# Altium PCB panelize_2025-07-22.pcbdoc
Units mm, origin at the board's own origin, x right, y up, seen from the top; angles counter-clockwise.
Board outline 175.32 x 105.77 mm, 2 copper layers (Top Layer, Bottom Layer); 56 components, 44 nets, 165 pads, 454 vias.
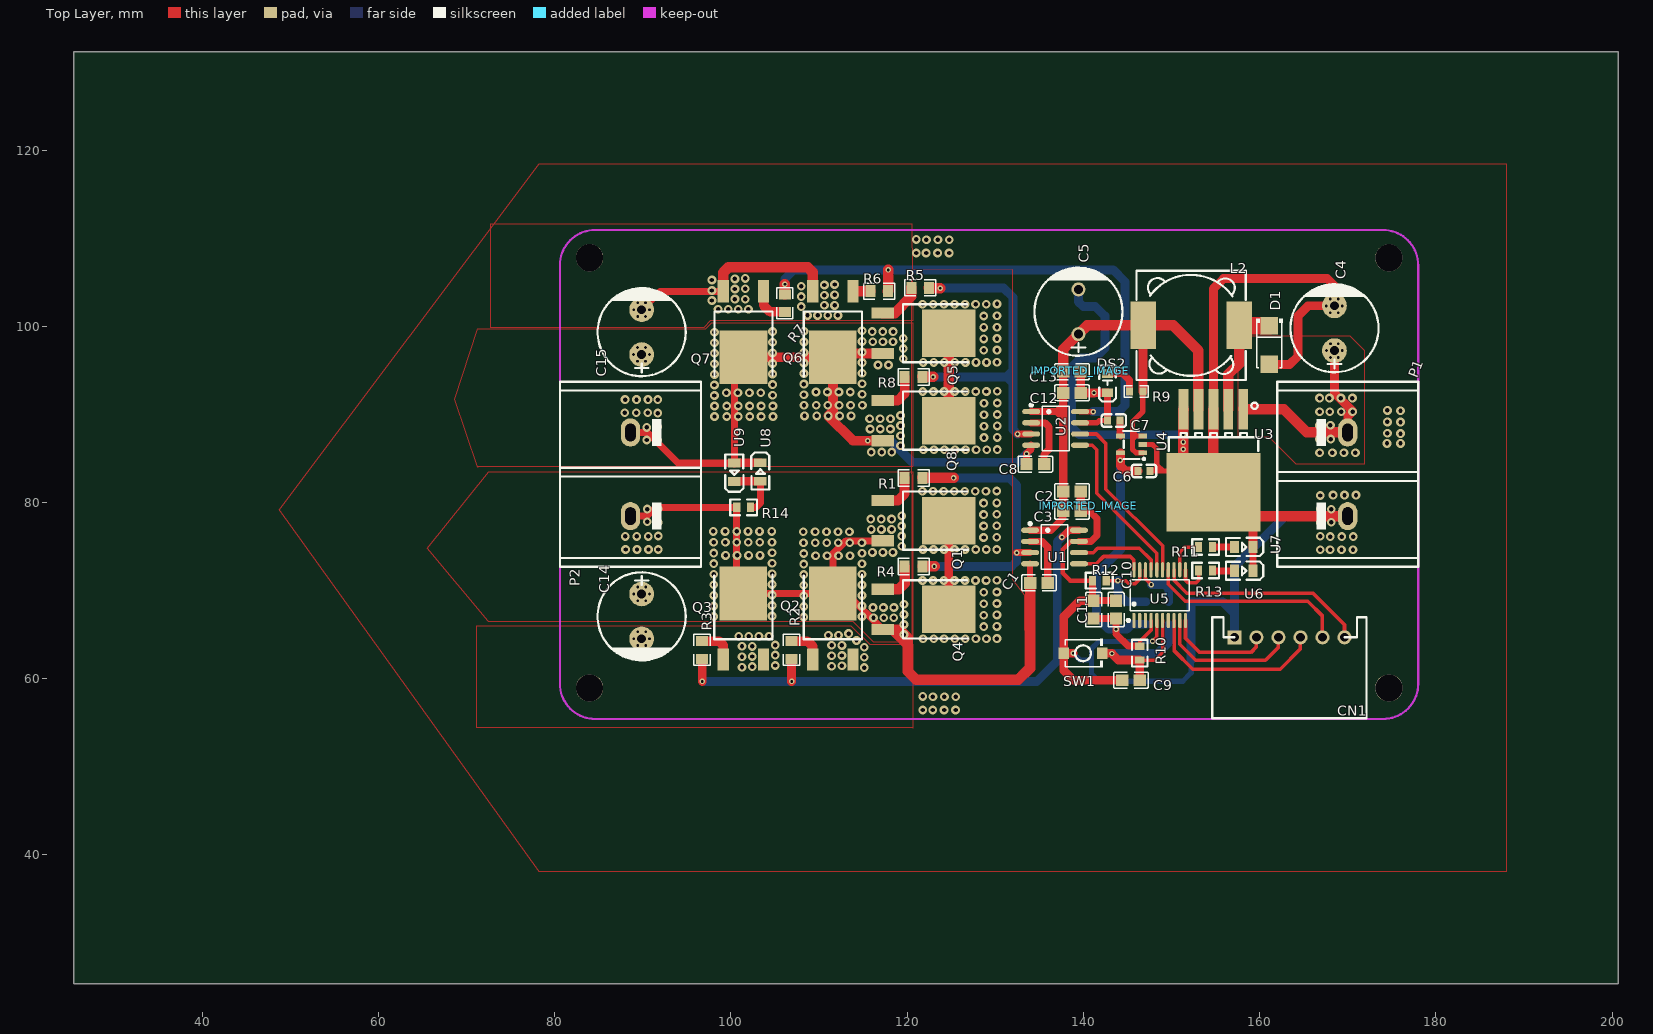
[diagram p0: Top Layer view]
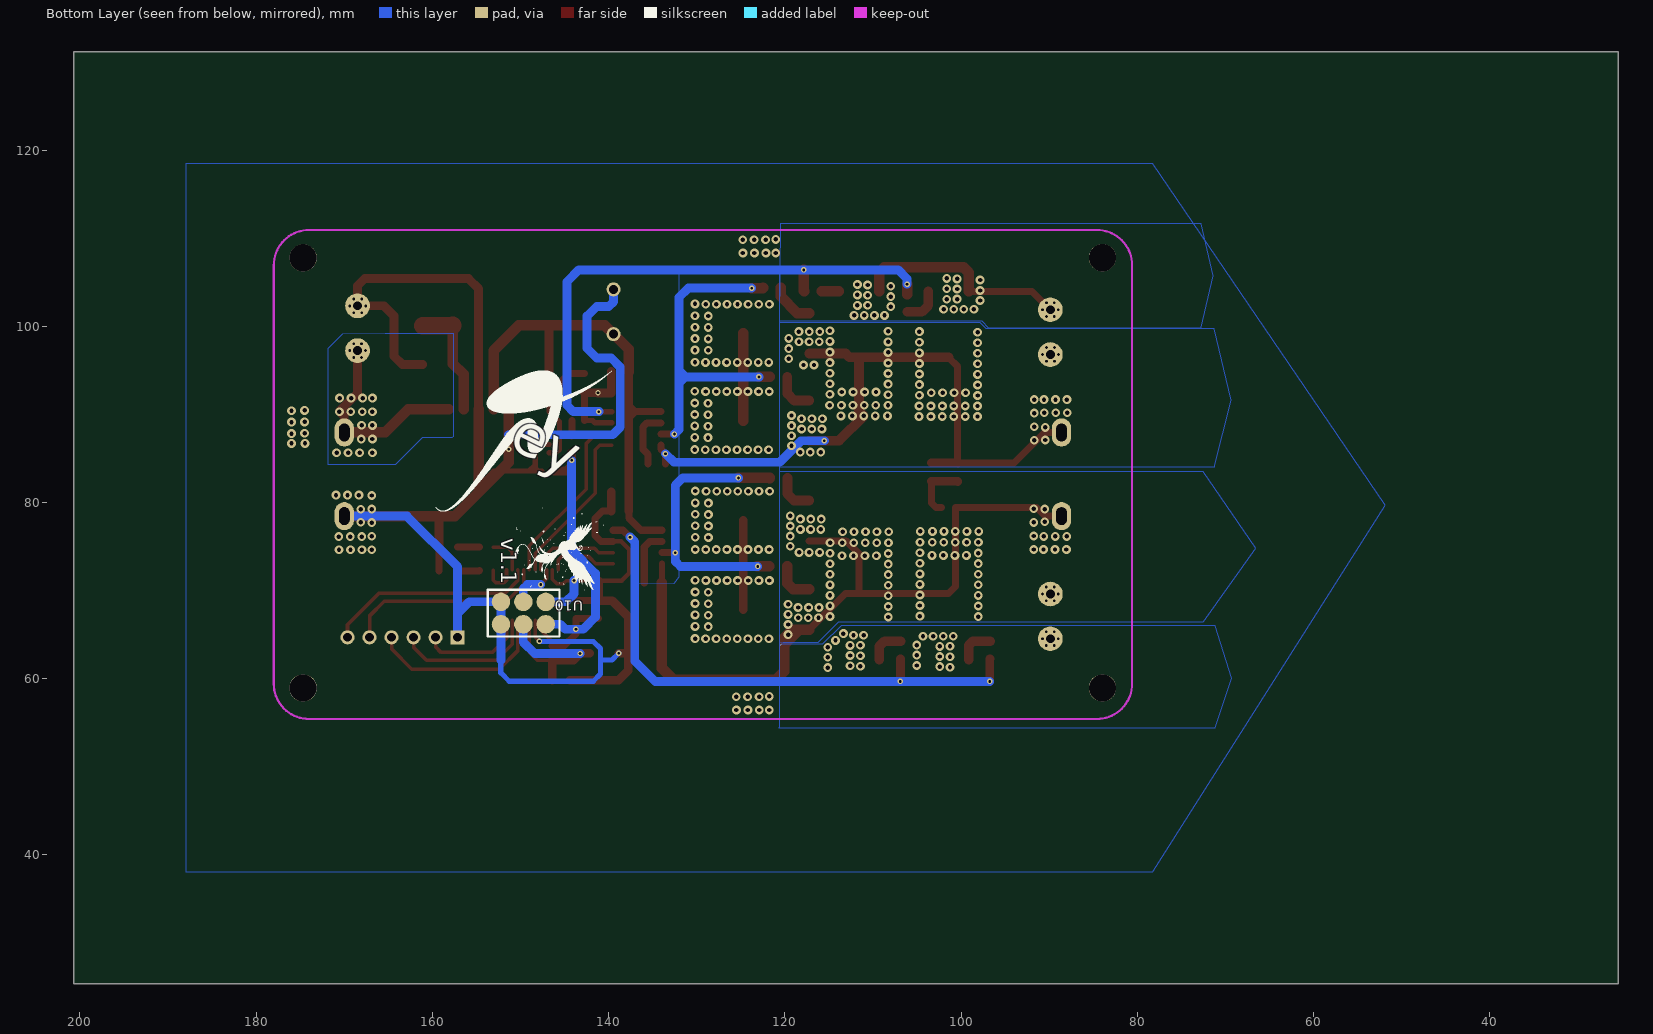
[diagram p1: Bottom Layer view, seen from below]

## Layer stack, top to bottom
Top Layer: signal copper (thickness not stored)
Dielectric: dielectric 0.32, FR-4, Dk 4.8
Bottom Layer: signal copper (thickness not stored)

## Board outline
200.72,25.4 25.4,25.4 25.4,131.17 200.72,131.17

## Components (designator, comment, footprint, x,y, rotation, side; value= is the part's Value field where it differs from the comment)
C1 "100nF" C0805 134.96,70.88 r0 top
C2 "1nf" C0805 138.71,81.23 r180 top
C3 "10uF" C0805 138.71,79.02 r180 top
C4 "470uF" CAP-TH_BD10.0-P5.00-D1.0-FD#1 168.5,99.78 r90 top
C5 "470uF" CAP-TH_BD10.0-P5.00-D1.0-FD#2 139.44,101.65 r90 top
C6 "2.2uF" C0603 146.888,83.583 r180 top
C7 "470pF" C0603 143.46,89.3 r0 top
C8 "100nF" C0805 134.55,84.35 r0 top
C9 "100nF" C0805 145.4,59.83 r0 top
C10 "10uF" C0805 143.713,67.835 r90 top
C11 "100nF" C0805 141.173,67.835 r270 top
C12 "10uF" C0805 138.71,92.437 r180 top
C13 "1nf" C0805 138.71,94.85 r180 top
C14 "470uF" CAP-TH_BD10.0-P5.00-D1.0-FD#1 89.865,67.073 r270 top
C15 "470uF" CAP-TH_BD10.0-P5.00-D1.0-FD#1 89.865,99.331 r90 top
CN1 "S6B-XH-A (LF)(SN)" CONN-TH_S6B-XH-A-LF-SN 163.39,64.7 r180 top
D1 "SS34-SMA(DO-214AC)" SMA_L4.3-W2.6-LS5.2-RD 161.11,97.88 r270 top
DS2 "LED0805-1" LED0805-RD 142.74,93.55 r90 top
IMPORTED_IMAGE "IMPORTED_IMAGE" IMPORTED_IMAGE 139.642,94.979 r0 top
IMPORTED_IMAGE "IMPORTED_IMAGE" IMPORTED_IMAGE 140.561,79.629 r0 top
L2 "33uH" IND-SMD_L12.3-W12.3 152.222,100.093 r0 top
P1 "WJ45C-B-2P" CONN-TH_2P-P9.50_WJ45C-B-2P 170.002,83.202 r270 top
P2 "WJ45C-B-2P" CONN-TH_2P-P9.50_WJ45C-B-2P 88.595,83.202 r90 top
Q1 "NCE30H12K" TO-252-3_L6.5-W5.8-P4.58-BL 120.98,77.94 r270 top
Q2 "NCE30H12K" TO-252-3_L6.5-W5.8-P4.58-BL 111.582,65.93 r0 top
Q3 "NCE30H12K" TO-252-3_L6.5-W5.8-P4.58-BL 101.422,65.93 r0 top
Q4 "NCE30H12K" TO-252-3_L6.5-W5.8-P4.58-BL 120.98,67.86 r270 top
Q5 "NCE30H12K" TO-252-3_L6.5-W5.8-P4.58-BL 120.98,99.204 r270 top
Q6 "NCE30H12K" TO-252-3_L6.5-W5.8-P4.58-BL 111.577,100.22 r180 top
Q7 "NCE30H12K" TO-252-3_L6.5-W5.8-P4.58-BL 101.422,100.22 r180 top
Q8 "NCE30H12K" TO-252-3_L6.5-W5.8-P4.58-BL 120.98,89.298 r270 top
R1 "4.7Ω" R0805 120.726,82.78 r180 top
R2 "4.7Ω" R0805 106.883,63.263 r90 top
R3 "4.7Ω" R0805 96.723,63.263 r90 top
R4 "4.7Ω" R0805 120.726,72.74 r180 top
R5 "4.7Ω" R0805 121.48,104.36 r180 top
R6 "4.7Ω" R0805 116.82,103.99 r180 top
R7 "4.7Ω" R0805 106.121,102.633 r270 top
R8 "4.7Ω" R0805 120.726,94.251 r180 top
R9 "10kΩ" R0603 145.999,92.6 r180 top
R10 "10k" 0603 146.4,62.9 r90 top
R11 "10k" 0603 153.873,74.947 r180 top
R12 "10k" 0603 141.808,71.137 r180 top
R13 "10k" 0603 153.873,72.28 r180 top
R14 "10k" 0603 101.44,79.44 r0 top
SW1 "TS-1088-AR02016" SW-SMD_L3.9-W3.0-P4.45 139.96,62.89 r0 top
U1 "UCC27282DR" SOIC-8_L4.9-W3.9-P1.27-LS6.0-BL 136.728,74.947 r270 top
U2 "UCC27282DR" SOIC-8_L4.9-W3.9-P1.27-LS6.0-BL 136.855,88.409 r270 top
U3 "LM2596HVS-12" PG-TO-263-5_L10.0-W9.0-P1.70-LS15.0-BR 154.762,85.869 r90 top
U4 "MIC5219-3.3YM5" SOT-23-5_L3.0-W1.7-P0.95-LS2.8-TL 145.47,86.59 r180 top
U5 "STM32G030F6P6TR" TSSOP-20_L6.5-W4.4-P0.65-LS6.4-BL 148.666,69.486 r0 top
U6 "YLED0805YG" LED0805-R-RD 158.191,72.25 r180 top
U7 "YLED0805YG" LED0805-R-RD 158.191,74.947 r180 top
U8 "YLED0805YG" LED0805-R-RD 103.34,83.46 r270 top
U9 "YLED0805YG" LED0805-R-RD 100.38,83.44 r90 top
U10 "POGO-6PIN" CONN-SMD_6P-POGO-6PIN 149.682,67.454 r180 bottom

## Footprints (in the part's own frame and the unit in brackets; to place one, negate y for a bottom-side part, rotate by r counter-clockwise, add the part's x,y. Pads: shape width x height; smd on the part's side, far side on the other; paste and mask are expansions set on the pad)
0603 [mil]
  rect 32x43 smd paste+0 mask+2: 1(-31,0) 2(31,0)
  silkscreen extent -60,-35 60,35
C0603 [mm]
  rect 0.8x0.9 smd paste+0 mask+0.051: 1(-0.7,0) 2(0.7,0)
  silkscreen extent -1.39,-0.71 1.39,0.71
C0805 [mm]
  rect 1.41x1.35 smd paste-100 mask+0.051: 1(-1,0) 2(1,0)
  silkscreen extent -1.96,-0.9 1.96,0.9
CAP-TH_BD10.0-P5.00-D1.0-FD#1 [mm]
  round 2.8 hole 1 paste+0 mask+0.051: 1(-2.54,0) 2(2.54,0)
  silkscreen extent -5,-5 5.08,5
CAP-TH_BD10.0-P5.00-D1.0-FD#2 [mm]
  round 1.6 hole 1 paste+0 mask+0.051: 1(-2.54,0) 2(2.54,0)
  silkscreen extent -5,-5 5.08,5
CONN-SMD_6P-POGO-6PIN [mm]
  round 2.1 smd paste+0 mask+0.05: 1(2.54,-1.27) 2(2.54,1.27) 3(0,-1.27) 4(0,1.27) 5(-2.54,-1.27) 6(-2.54,1.27)
  silkscreen extent -4.05,-2.65 4.1,2.65
CONN-TH_2P-P9.50_WJ45C-B-2P [mm]
  oval 3.2x2.2 hole 1.2 slot 2 at 0 deg paste+0 mask+0.051: 1(-4.75,0) 2(4.75,0)
  silkscreen extent -10.5,-8 10.5,8
CONN-TH_S6B-XH-A-LF-SN [mm]
  rect 1.6x1.6 hole 1 paste+0 mask+0.051: 1(6.25,0)
  round 1.6 hole 1 paste+0 mask+0.051: 2(3.75,0) 3(1.25,0) 4(-1.25,0) 5(-3.75,0) 6(-6.25,0)
  silkscreen extent -8.75,-2.3 8.75,9.2
IMPORTED_IMAGE [mm]
IND-SMD_L12.3-W12.3 [mm]
  rect 2.9x5.4 smd paste+0 mask+0.051: 1(-5.45,0) 2(5.45,0)
  silkscreen extent -6.2,-6.2 6.2,6.2
LED0805-R-RD [mm]
  rect 1x1.4 smd paste+0 mask+0.051: 1(1.05,0) 2(-1.05,0)
  silkscreen extent -2.22,-1.04 1.99,1.01
LED0805-RD [mm]
  rect 1x1.25 smd paste+0 mask+0.051: 1(-1.1,0) 2(1.1,0)
  silkscreen extent -2.1,-0.95 1.98,0.96
PG-TO-263-5_L10.0-W9.0-P1.70-LS15.0-BR [mm]
  rect 4.6x1.1 smd paste+0 mask+0.051: 1(4.699,-3.4) 2(4.699,-1.7) 3(4.699,0) 4(4.699,1.7) 5(4.699,3.4)
  rect 8.89x10.668 smd paste+0 mask+0.051: 6(-4.699,0)
  silkscreen extent -0.02,-5.08 5.47,5.08
R0603 [mm]
  rect 0.806x0.864 smd paste-100 mask+0.051: 1(-0.753,0) 2(0.753,0)
  silkscreen extent -1.39,-0.66 1.39,0.66
R0805 [mm]
  rect 1.133x1.377 smd paste-100 mask+0.051: 1(-1,0) 2(1,0)
  silkscreen extent -1.76,-0.92 1.76,0.92
SMA_L4.3-W2.6-LS5.2-RD [mm]
  rect 2x2 smd paste+0 mask+0.051: 1(-2.2,0) 2(2.2,0)
  silkscreen extent -2.98,-1.5 2.6,1.5
SOIC-8_L4.9-W3.9-P1.27-LS6.0-BL [mm]
  oval 0.588x2.045 smd paste+0 mask+0.051: 1(-1.905,-2.773) 2(-0.635,-2.773) 3(0.635,-2.773) 4(1.905,-2.773) 5(1.905,2.773) 6(0.635,2.773) 7(-0.635,2.773) 8(-1.905,2.773)
  silkscreen extent -2.8,-2.92 2.53,1.52
SOT-23-5_L3.0-W1.7-P0.95-LS2.8-TL [mm]
  rect 1x0.55 smd paste+0 mask+0.051: 1(-1.271,0.95) 2(-1.271,0) 3(-1.271,-0.95) 4(1.271,-0.95) 5(1.271,0.95)
  silkscreen extent -1.52,-1.52 0.97,1.78
SW-SMD_L3.9-W3.0-P4.45 [mm]
  rect 1.23x1.36 smd paste+0 mask+0.051: 1(-2.185,0) 2(2.185,0)
  silkscreen extent -2.03,-1.62 2.25,1.62
TO-252-3_L6.5-W5.8-P4.58-BL [mm]
  rect 1.27x2.54 smd paste+0 mask+0.051: 1(-2.288,-3.747) 3(2.288,-3.745)
  rect 5.4x6.1 smd paste+0 mask+0.051: 2(-0.002,3.747)
  silkscreen extent -3.31,-1.46 3.3,5.9
TSSOP-20_L6.5-W4.4-P0.65-LS6.4-BL [mm]
  oval 0.364x1.742 smd paste+0 mask+0.051: 1(-2.925,-2.871) 2(-2.275,-2.871) 3(-1.625,-2.871) 4(-0.975,-2.871) 5(-0.325,-2.871) 6(0.325,-2.871) 7(0.975,-2.871) 8(1.625,-2.871) 9(2.275,-2.871) 10(2.925,-2.871) 11(2.925,2.871) 12(2.275,2.871) 13(1.625,2.871) 14(0.975,2.871) 15(0.325,2.871) 16(-0.325,2.871) 17(-0.975,2.871) 18(-1.625,2.871) 19(-2.275,2.871) 20(-2.925,2.871)
  silkscreen extent -3.71,-3.02 3.33,1.77

## Free pads (board coordinates)
  round 3.1 hole 3.1 unplated paste+0: ""(83.955,58.95) ""(83.955,107.78) ""(174.68,58.95) ""(174.68,107.78)

## Via types
v1: diameter 1, hole 0.5, Top Layer to Bottom Layer, tented both sides, 393 vias
v2: diameter 0.62, hole 0.31, Top Layer to Bottom Layer, tented both sides, 61 vias

## Nets (pads, with @x,y where several pads share a name; then routed paths per layer and width w, separated by ;. In a path a pad name is that pad's centre, name@x,y a point inside that pad or via, vN(x,y) a via of type N, cw(c..) or ccw(c..) an arc to the next point about the centre after c; other vN are vias at no path point)
3V3: C6.2 C10.1 C11.2 R10.2 U4.5 U5.4 U10.1 | length 40.1
  Top Layer w0.4: R10.2 146.4,64.231 147.691,65.521 U5.4@147.691,66.616
  Top Layer w0.8: C11.2 C10.1 v2(143.711,65.615) ; v2(143.711,65.615) 143.71,65.089 145.112,63.687 R10.2
  Top Layer w1: U4.5 144.2,85.639 v2(144.2,84.8) ; v2(144.2,84.8) 144.201,84.16 144.777,83.583 C6.2
  Bottom Layer w1: v2(144.2,84.8) 144.201,74.64 141.49,71.93 141.49,67.02 142.895,65.615 v2(143.711,65.615) 144.914,65.615 145.483,66.184 U10.1
12V: C2.2 C3.2 C5.1 C12.2 C13.2 L2.1 R9.1 U1.1 U2.1 U3.4 U4.1 U4.3 | length 73.5
  Top Layer w0.6: 145.58,89.171 145.58,87.99 146.029,87.54 U4.3 145.941,87.54 145.58,87.18 ; U4.1 145.971,85.641 145.58,86.029 145.58,87.18 ; R9.1 146.752,90.343 145.58,89.17 145.58,87.18
  Top Layer w0.8: U1.1 136.342,76.852 137.711,78.221 C3.2@137.711,79.019 ; U2.1 137.71,90.314
  Top Layer w1: 137.139,90.314 137.71,89.744 137.71,89.51 ; 137.165,90.314 137.71,90.859 137.71,91.428 ; C3.2@137.71,79.02 137.71,81.23 C12.2 C13.2 ; R9.1@146.753,92.6 L2.1
  Top Layer w1.2: C13.2 137.71,97.38 C5.1 140.423,100.093 L2.1 150.198,100.093 153.063,97.228 U3.4
C1_2: C1.2 U1.2 | length 6.3
  Top Layer w0.8: U1.2 135.339,75.582 135.96,74.961 C1.2
C8_2: C8.2 U2.2 | length 6.7
  Top Layer w0.8: U2.2 135.666,89.044 136.12,88.59 136.12,86.04 135.55,85.47 C8.2
CH1: CN1.6 U5.13 | length 24.1
  Top Layer w0.4: U5.13 150.292,71.168 151.75,69.71 166.07,69.71 169.639,66.141 CN1.6@169.639,64.701
CH2: CN1.5 U5.14 | length 23.1
  Top Layer w0.4: U5.14 149.641,70.708 151.569,68.78 165.48,68.78 167.14,67.12 CN1.5
DIR: CN1.4 U5.8 | length 20.9
  Top Layer w0.4: U5.8@150.292,66.616 150.292,63.198 152.4,61.09 162.35,61.09 164.64,63.38 CN1.4
DS2_2: DS2.2 R9.2 | length 4.1
  Top Layer w0.8: DS2.2 144.47,94.65 145.246,93.874 R9.2
GND: C2.1 C3.1 C4.2 C5.2 C6.1 C7.1 C9.1 C10.2 C11.1 C12.1 C13.1 C14.2 C15.2 CN1.1 D1.2 DS2.1 P1.2 Q2.3 Q3.3 Q6.3 Q7.3 R12.2 SW1.1 U1.7 U2.7 U3.3 U3.5 U3.6 U4.2 U5.5 U6.2 U7.2 U10.5 U10.6 | length 796
  Top Layer w0.4: v2(147.85,64.25) 148.341,64.741 U5.5
  Top Layer w0.5: U1.7@139.502,75.582 138.562,75.582 137.65,74.67 137.65,71.993 138.506,71.137 R12.2
  Top Layer w0.6: U2.7@139.629,89.044 141.554,89.044 141.81,89.301 C7.1 ; U4.2 147.84,86.591 148.331,86.1 148.331,83.921 147.993,83.583 147.589,83.583 153.027,83.583 154.762,81.848 U3.6 ; 148.331,84.285 149.032,83.583 149.174,83.583
  Top Layer w0.8: C15.2 91.959,103.965 Q7.3 ; U1.7@139.502,75.582 140.863,75.582 141.539,76.26 141.539,78.17 140.689,79.02 C3.1 ; R12.2 141.021,68.959 141.12,68.86 143.688,68.86 C10.2 ; DS2.1 142.74,89.32 C7.1@142.76,89.3 ; U6.2 U7.2
  Top Layer w1: v2(138.85,62.89) SW1.1 ; C3.1 C2.1 ; C12.1 C13.1 ; C12.1 v2(141.206,92.444) DS2.1 ; C11.1@141.12,68.859 139.591,68.859 137.774,67.045 SW1.1 ; C9.1 138.882,59.829 137.774,60.934 SW1.1 ; U3.3 154.762,104.261 155.92,105.42 167.66,105.42 168.501,104.579 168.501,102.321 165.509,102.321 164.371,101.18 164.371,96.621 163.428,95.679 D1.2 ; U7.2 159.24,78.452 P1.2
  Top Layer w1.2: Q7.3 99.13,106.099 99.72,106.69 108.709,106.69 109.288,106.11 Q6.3 ; v2(151.35,86.04) 151.35,84.582 U3.6 157.479,78.452 P1.2 ; v2@151.35,87.68 v2@151.351,86.039 ; v2@151.36,87.68 151.36,90.566 U3.5 ; U3.6 U3.3
  Mid-Layer 1 w3: C15.2 89.865,105.854 93.119,109.11 166.04,109.11 168.501,106.649 C4.2@168.501,102.321
  Mid-Layer 1 w4: C4.2@168.501,102.321 171.501,102.321 175.73,98.089 175.73,81.569 172.613,78.452 P1.2
  Mid-Layer 2 w1.2: v2(141.206,92.444) 149.966,92.443 151.351,91.058 v2@151.351,86.86
  Mid-Layer 2 w2.5: C5.2 139.441,109.11 139.491,109.11
  Mid-Layer 2 w3: C15.2 89.865,105.854 93.119,109.11 166.04,109.11 168.501,106.649 C4.2@168.501,102.321
  Mid-Layer 2 w4: C4.2@168.501,102.321 171.501,102.321 175.73,98.089 175.73,81.569 172.613,78.452 P1.2
  Mid-Layer 3 w3: C15.2 89.865,105.853 93.119,109.11 166.04,109.11 168.501,106.648 C4.2@168.501,102.32
  Mid-Layer 3 w4: C4.2@168.501,102.32 171.501,102.32 175.73,98.089 175.73,81.568 172.613,78.452 P1.2
  Mid-Layer 4 w3: C15.2 89.865,105.854 93.119,109.11 166.04,109.11 168.501,106.649 C4.2@168.501,102.321
  Mid-Layer 4 w4: C4.2@168.501,102.321 171.501,102.321 175.73,98.089 175.73,81.569 172.613,78.452 P1.2
  Bottom Layer w0.6: v2(138.85,62.89) 139.619,62.121 140.929,62.121 ; v2@147.851,64.251 141.75,64.231 140.929,63.411 140.929,60.54 141.752,59.717 151.277,59.717 152.23,60.67 152.23,62.12
  Bottom Layer w1: C5.2 139.441,102.798 139.989,102.25 141.351,102.25 142.451,101.15 142.451,97.51 141.341,96.4 139.71,96.4 138.68,95.37 138.68,88.54 139.54,87.68 v2@151.36,87.68 ; 152.23,62.12 152.23,66.176 U10.5 U10.6 155.826,68.724 157.139,67.411 CN1.1@157.139,64.701 ; CN1.1 157.14,72.69 162.903,78.452 P1.2
  other v1: 121.78,56.448 122.895,56.448 124.196,56.448 125.496,56.448 122.926,57.943 124.226,57.943 125.526,57.943 121.78,57.99 115.134,61.26 101.255,61.31 102.415,61.37 111.429,61.42 112.59,61.48 105.03,61.5 115.135,62.445 101.255,62.495 102.415,62.52 111.429,62.605 112.59,62.63 105.03,62.685 115.134,63.58 101.255,63.68 102.415,63.67 111.429,63.79 112.59,63.78 105.03,63.82 114.247,64.35 100.885,64.82 102.032,64.82 103.178,64.82 104.325,64.82 111.059,64.93 112.206,64.93 113.359,65.12 166.885,74.63 168,74.63 169.3,74.63 170.6,74.63 168.03,76.125 169.33,76.125 170.63,76.125 166.885,76.172 166.885,77.714 168.13,77.751 168.13,79.231 166.885,79.256 166.885,80.798 168.339,80.845 169.639,80.845 170.939,80.845 174.457,86.705 175.999,86.705 175.999,87.82 174.505,87.85 175.999,89.12 174.505,89.15 175.999,90.42 174.505,90.45 108.695,101.23 109.842,101.23 110.988,101.23 112.135,101.23 98.545,101.93 99.692,101.93 100.838,101.93 101.985,101.93 107.99,102.23 111.765,102.37 110.605,102.38 97.84,102.93 100.455,103.08 101.615,103.07 107.99,103.365 110.605,103.53 111.765,103.555 97.84,104.065 100.455,104.23 101.615,104.255 107.99,104.55 110.605,104.68 111.765,104.74 97.84,105.25 100.455,105.38 101.615,105.44 121.04,108.32 122.155,108.32 123.456,108.32 124.756,108.32 122.186,109.815 123.486,109.815 124.786,109.815 121.04,109.862
  other v2: 89.42,63.761 90.32,63.761 88.97,64.541 90.77,64.541 89.42,65.32 90.32,65.32 151.35,86.86 151.35,87.68 89.41,101.1 90.31,101.1 168.03,101.531 168.93,101.531 88.96,101.88 90.76,101.88 167.58,102.311 169.38,102.311 89.41,102.659 90.31,102.659 168.03,103.09 168.93,103.09
HO1: R1.1 R4.1 U1.3 | length 32.1
  Top Layer w0.8: v2(132.43,74.31) 133.952,74.31 U1.3
  Top Layer w1.2: R1.1@121.71,82.78 121.72,82.79 v2(125.27,82.79) ; R4.1@121.79,72.74 v2@123.13,72.74
  Bottom Layer w1: v2(123.09,72.74) 131.849,72.74 132.43,73.319 v2(132.43,74.31) 132.43,81.95 131.59,82.79 v2(125.27,82.79)
HO2: R5.1 R8.1 U2.3 | length 42.6
  Top Layer w0.8: v2(132.53,87.77) 134.077,87.77 U2.3
  Top Layer w1.2: R8.1 v2(122.946,94.251) ; R5.1 122.51,104.33 v2(123.76,104.33)
  Bottom Layer w1: v2(122.946,94.251) 131.28,94.251 ; v2(123.76,104.33) 130.97,104.33 132.029,103.271 132.029,91.132 ; 132.029,96.251 132.029,95 131.28,94.251 ; v2(132.53,87.77) 132.029,88.271 132.029,93.499 131.28,94.251
LO1: R2.1 R3.1 U1.8 | length 62.9
  Top Layer w0.8: v2(137.57,76.07) 138.352,76.852 U1.8
  Top Layer w1: R3.1 96.74,62.245 v2(96.74,59.69) ; R2.1 106.883,59.697 v2(106.89,59.69)
  Bottom Layer w1: v2(96.74,59.69) 106.45,59.69 v2(106.89,59.69) 107.36,59.69 134.709,59.69 137.03,62.011 137.03,75.529 v2(137.57,76.07)
LO2: R6.1 R7.1 U2.8 | length 63.2
  Top Layer w0.6: U2.8@139.629,90.314 139.633,90.31 v2(141.11,90.31)
  Top Layer w1.2: R7.1@106.121,103.634 106.13,103.643 v2(106.13,104.77) ; R6.1 117.85,104.02 v2(117.85,106.4)
  Bottom Layer w1: v2@106.131,104.769 106.131,105.401 107.13,106.4 v2(117.85,106.4) 143.38,106.4 144.72,105.06 144.72,91.03 144,90.31 v2(141.11,90.31)
MA: C1.1 P2.1 Q1.3 Q2.2 Q3.2 Q4.3 R14.1 U1.4 | length 88.8
  Top Layer w0.7: U1.4 133.96,73.038 C1.1
  Top Layer w0.8: P2.1 90.452,78.452 91.44,79.44 R14.1 ; R14.1 100.652,70.445 Q3.2 Q2.2 ; Q1.3@117.235,75.652 113.049,75.652 111.579,74.183 Q2.2 ; Q4.3@117.236,65.572 113.131,69.677 Q2.2
  Top Layer w1: Q4.3@117.236,65.572 118.219,65.572 120.06,63.731 120.06,63.022
  Top Layer w1.2: Q4.3@117.236,65.572 119.128,65.572 120.06,64.64 120.06,60.84 121.031,59.87 132.621,59.87 133.959,61.211 C1.1
  other v1: 119.635,65.01 119.635,66.157 116.185,66.92 117.335,66.92 118.485,66.92 108.27,67 98.06,67.05 114.88,67.06 104.67,67.11 119.635,67.304 116.125,68.08 117.31,68.08 118.495,68.08 108.27,68.2 98.06,68.25 114.88,68.26 104.67,68.31 119.635,68.45 108.27,69.41 114.88,69.45 98.06,69.46 104.67,69.5 108.27,70.61 114.88,70.65 98.06,70.66 104.67,70.7 108.27,71.81 98.06,71.86 114.88,71.85 104.67,71.9 108.27,73.01 98.06,73.06 114.88,73.05 104.67,73.1 109.61,73.945 110.91,73.945 112.21,73.945 113.51,73.945 99.4,73.995 100.7,73.995 102,73.995 103.3,73.995 108.27,74.21 114.88,74.25 98.06,74.26 104.67,74.3 116.06,74.335 117.245,74.335 118.38,74.335 88.039,74.66 89.339,74.66 90.64,74.66 91.755,74.66 119.38,75.04 108.24,75.44 109.58,75.44 110.88,75.44 112.18,75.44 113.48,75.44 114.87,75.44 98.03,75.49 99.37,75.49 100.67,75.49 101.97,75.49 103.27,75.49 104.66,75.49 88.009,76.154 89.309,76.154 90.609,76.154 119.38,76.187 91.755,76.202 108.21,76.67 109.55,76.67 110.85,76.67 112.15,76.67 113.45,76.67 98,76.72 99.34,76.72 100.652,76.72 101.94,76.72 103.24,76.72 104.63,76.72 115.93,76.95 117.08,76.95 118.23,76.95 119.38,77.334 91.755,77.744 90.509,77.815 115.87,78.11 117.055,78.11 118.24,78.11 119.38,78.48 90.506,79.253 91.755,79.286
MB: C8.1 P2.2 Q5.3 Q6.2 Q7.2 Q8.3 U2.4 U8.2 U9.1 | length 80.6
  Top Layer w0.8: P2.2 90.538,87.952 94,84.49 U9.1 ; U9.1 100.38,95.429 Q7.2 ; C8.1 v2(133.55,85.54) 134.083,86.073 U2.4
  Top Layer w1: U9.1 U8.2
  Top Layer w1.1: Q7.2 Q6.2 111.579,90.369 v1(111.04,89.83) 113.86,87.01 v2(115.515,87.01) Q8.3@117.235,87.01 ; Q6.2 112.661,96.474 113.103,96.916 Q5.3@117.236,96.916
  Bottom Layer w1: v2(115.515,87.01) 118.15,87.01 120.599,84.561 132.57,84.561 v2(133.55,85.54)
  other v1: 115.93,85.725 117.115,85.725 118.25,85.725 119.25,86.43 91.7,87.056 90.451,87.089 119.25,87.577 115.8,88.34 116.95,88.34 118.1,88.34 90.454,88.527 91.7,88.598 119.25,88.724 115.74,89.5 116.925,89.5 118.11,89.5 98.14,89.76 99.53,89.76 100.83,89.76 102.13,89.76 103.43,89.76 104.77,89.76 108.35,89.83 109.74,89.83 112.34,89.83 113.64,89.83 119.25,89.87 91.7,90.14 87.954,90.188 89.254,90.188 90.554,90.188 98.13,90.95 99.52,90.95 100.82,90.95 102.12,90.95 103.42,90.95 104.76,90.95 108.29,91.045 109.68,91.045 110.98,91.045 112.28,91.045 113.58,91.045 114.92,91.045 87.984,91.682 89.284,91.682 90.584,91.682 91.699,91.682 98.12,92.14 104.73,92.18 108.28,92.235 114.89,92.275 99.49,92.445 100.79,92.445 102.09,92.445 103.39,92.445 109.65,92.54 110.95,92.54 112.25,92.54 113.55,92.54 98.12,93.34 104.73,93.38 108.28,93.435 114.89,93.475 98.12,94.54 104.73,94.58 108.28,94.635 114.89,94.675 116.695,95.6 117.88,95.6 98.12,95.74 104.73,95.78 108.28,95.835 114.89,95.875 119.55,96.325 98.12,96.941 104.73,96.98 108.28,97.035 114.89,97.075 119.55,97.472 98.12,98.13 104.73,98.19 108.28,98.225 116.1,98.235 117.25,98.235 118.4,98.235 114.89,98.285 119.55,98.618 98.12,99.33 104.73,99.39 116.04,99.395 117.225,99.395 118.409,99.395 108.28,99.425 114.89,99.485
NRST: C9.2 R10.1 SW1.2 U5.6 U10.3 | length 22.4
  Top Layer w0.4: R10.1 148.107,62.113 148.991,62.996 U5.6@148.991,66.616
  Top Layer w1: SW1.2 143.21,62.89 v2(143.24,62.86) 143.987,62.113 R10.1 ; C9.2 R10.1
  Bottom Layer w1: v2(143.24,62.86) 148.369,62.859 149.682,64.132 U10.3
Q3_1: Q3.1 R3.2 | length 4.2
  Top Layer w1.1: R3.2@96.723,64.264 98.643,64.264 99.133,63.774 Q3.1
Q4_1: Q4.1 R4.2 | length 4.7
  Top Layer w1.2: Q4.1@117.233,70.149 119.027,70.149 119.725,70.845 R4.2
Q7_1: Q7.1 R7.2 | length 4.3
  Top Layer w1.1: Q7.1 103.71,102.377 104.455,101.632 R7.2
Q8_1: Q8.1 R8.2 | length 4.7
  Top Layer w1.1: Q8.1 118.95,91.587 119.725,92.361 R8.2
QH1: U1.5 U5.20 | length 7.8
  Top Layer w0.4: U1.5@139.502,73.042 141.463,73.042 142.291,73.87 145.311,73.87 145.74,73.438 U5.20
QH2: U2.5 U5.16 | length 18.6
  Top Layer w0.4: U2.5@139.629,86.504 141.026,86.504 141.539,85.991 141.539,81.041 148.341,74.239 U5.16
QL1: U1.6 U5.17 | length 10.1
  Top Layer w0.4: U1.6@139.502,74.312 141.112,74.312 141.61,74.81 146.36,74.81 147.691,73.479 U5.17
QL2: U2.6 U5.15 | length 20.4
  Top Layer w0.4: U2.6@139.629,87.774 141.485,87.774 142.56,86.7 142.56,81.521 148.991,75.089 U5.15
R1_2: Q1.1 R1.2 | length 4.6
  Top Layer w1.1: Q1.1 118.958,80.228 119.71,80.98 R1.2@119.71,82.78
R2_2: Q2.1 R2.2 | length 4.1
  Top Layer w1.1: R2.2@106.883,64.264 108.676,64.264 109.293,63.647 Q2.1
R5_2: Q5.1 R5.2 | length 5
  Top Layer w1.2: Q5.1 118.582,101.493 120.48,103.39 R5.2
R6_2: Q6.1 R6.2 | length 2
  Top Layer w1.2: Q6.1 R6.2
R11_1: R11.1 U7.1 | length 2.5
  Top Layer w0.8: R11.1 U7.1
R13_1: R13.1 U6.1 | length 2.5
  Top Layer w0.8: R13.1 154.69,72.25 U6.1@157.179,72.25
SWCLK: R12.1 U5.19 U10.2 | length 10.3
  Top Layer w0.4: R12.1 v2(143.925,71.137) 144.803,71.137 145.14,70.799 145.89,70.799 146.39,71.3 U5.19
  Bottom Layer w1: v2(143.925,71.137) 143.924,69.664 144.866,68.724 U10.2
SWDIO: U5.18 U10.4 | length 5.6
  Top Layer w0.4: U5.18 147.041,71.369 v2(147.72,70.69)
  Bottom Layer w1: v2(147.72,70.69) 149.21,70.69 149.682,70.218 U10.4
U3_2: D1.1 L2.2 U3.2 | length 13.5
  Top Layer w1.2: U3.2 156.461,94.543 157.673,95.752 L2.2
  Top Layer w2: L2.2 D1.1
U4_4: C7.2 U4.4 | length 1.8
  Top Layer w0.8: C7.2@144.16,89.3 144.16,87.579 U4.4
U5_1: U5.1
U5_2: U5.2
U5_3: U5.3
U5_7: U5.7
U5_11: R13.2 U5.11 | length 4
  Top Layer w0.4: U5.11@151.592,72.356 151.592,71.168 151.879,70.881 152.791,70.881 153.086,71.175 R13.2
U5_12: R11.2 U5.12 | length 4.4
  Top Layer w0.4: U5.12 150.942,74.371 151.516,74.947 R11.2
U9_2: R14.2 U8.1 U9.2 | length 6.8
  Top Layer w0.8: R14.2 102.85,79.44 103.34,79.93 U8.1
  Top Layer w1: U9.2 U8.1
UART2_RX: CN1.2 U5.10 | length 12.1
  Top Layer w0.4: U5.10@151.592,66.616 151.592,64.608 153.22,62.98 159.02,62.98 159.64,63.6 CN1.2
UART2_TX: CN1.3 U5.9 | length 16.4
  Top Layer w0.4: U5.9@150.942,66.616 150.942,63.928 152.77,62.1 160.67,62.1 162.14,63.57 CN1.3
VBAT+: C4.1 C14.1 C15.1 P1.1 Q1.2 Q4.2 Q5.2 Q8.2 U3.1 | length 661.1
  Top Layer w1: Q4.2 Q1.2 ; C4.1@168.501,97.241 168.501,92.409 170.56,90.35 170.002,89.792 P1.1
  Top Layer w1.2: Q8.2 Q5.2 ; U3.1 162.743,90.568 165.359,87.952 P1.1
  Mid-Layer 1 w2.5: 116.703,81.78 119.659,81.78 123.309,85.43
  Mid-Layer 1 w3: v1(128.675,78.63) 154.715,78.63 v1(167.93,91.845) 168.501,92.416 C4.1@168.501,97.241
  Mid-Layer 1 w4: 83.37,77.789 83.37,80.649 86.139,83.461 ; 83.37,89.034 83.37,86.23 86.139,83.461 ; v1@128.823,78.661 123.98,78.661 120.861,81.78 113.721,81.78 112.039,83.461 86.139,83.461
  Mid-Layer 1 w5: C14.1 85.458,69.613 83.37,71.701 83.37,94.779 85.382,96.791 C15.1
  Mid-Layer 2 w2.5: 116.703,81.78 119.659,81.78 123.309,85.429
  Mid-Layer 2 w3: v1(128.675,78.63) 154.715,78.63 v1(167.93,91.845) 168.501,92.416 C4.1@168.501,97.241
  Mid-Layer 2 w4: 83.37,77.789 83.37,80.649 86.139,83.461 ; 83.37,89.034 83.37,86.23 86.139,83.461 ; v1@128.824,78.66 123.98,78.66 120.861,81.78 113.721,81.78 112.039,83.461 86.139,83.461
  Mid-Layer 2 w5: C14.1 85.458,69.613 83.37,71.701 83.37,94.779 85.382,96.791 C15.1
  Mid-Layer 3 w2.5: 116.703,81.779 119.659,81.779 123.309,85.429
  Mid-Layer 3 w3: v1(128.675,78.63) 154.715,78.63 v1(167.93,91.845) 168.501,92.416 C4.1@168.501,97.24
  Mid-Layer 3 w4: 83.371,77.789 83.371,80.649 86.139,83.461 ; 83.371,89.033 83.371,86.229 86.139,83.461 ; v1@128.824,78.66 123.98,78.66 120.861,81.779 113.721,81.779 112.039,83.461 86.139,83.461
  Mid-Layer 3 w5: C14.1 85.458,69.613 83.371,71.701 83.371,94.779 85.382,96.791 C15.1
  Mid-Layer 4 w2.5: 116.703,81.78 119.659,81.78 123.309,85.43
  Mid-Layer 4 w3: v1(128.675,78.63) 154.715,78.63 v1(167.93,91.845) 168.501,92.416 C4.1@168.501,97.241
  Mid-Layer 4 w4: 83.37,77.789 83.37,80.649 86.139,83.461 ; 83.37,89.034 83.37,86.23 86.139,83.461 ; v1@128.824,78.661 123.98,78.661 120.861,81.78 113.721,81.78 112.039,83.461 86.139,83.461
  Mid-Layer 4 w5: C14.1 85.458,69.613 83.37,71.701 83.37,94.779 85.382,96.791 C15.1
  other v1: 121.81,64.54 123.01,64.54 124.2,64.54 125.4,64.54 126.6,64.54 127.8,64.54 129,64.54 130.19,64.55 128.695,65.91 130.19,65.94 128.695,67.21 130.19,67.24 128.695,68.51 130.19,68.54 128.695,69.81 130.19,69.84 121.75,71.15 122.95,71.15 124.16,71.15 125.36,71.15 126.56,71.15 127.76,71.15 128.96,71.15 130.19,71.18 121.79,74.66 122.99,74.66 124.18,74.66 125.38,74.66 126.58,74.66 127.78,74.66 128.98,74.66 130.17,74.67 128.675,76.03 130.17,76.06 128.675,77.33 130.17,77.36 130.17,78.66 128.675,79.93 130.17,79.96 121.73,81.27 122.93,81.27 124.14,81.27 125.34,81.27 126.54,81.27 127.74,81.27 128.94,81.27 130.17,81.3 166.812,85.653 168.269,85.653 169.569,85.653 170.869,85.653 121.84,85.99 123.04,85.99 124.23,85.99 125.43,85.99 126.63,85.99 127.83,85.99 129.03,85.99 130.22,86 166.812,87.201 168.08,87.199 128.725,87.36 130.22,87.39 128.725,88.66 130.22,88.69 166.812,88.749 168.04,88.77 128.725,89.96 130.22,89.99 166.812,90.297 167.96,90.304 169.26,90.304 170.56,90.304 128.725,91.26 130.22,91.29 166.812,91.845 169.23,91.845 170.53,91.845 121.78,92.6 122.98,92.6 124.19,92.6 125.39,92.6 126.59,92.6 127.79,92.6 128.99,92.6 130.22,92.63 121.82,95.9 123.02,95.9 124.21,95.9 125.41,95.9 126.61,95.9 127.81,95.9 129.01,95.9 130.2,95.91 128.705,97.27 130.2,97.3 128.705,98.57 130.2,98.6 128.705,99.87 130.2,99.9 128.705,101.17 130.2,101.2 121.76,102.51 122.96,102.51 124.17,102.51 125.37,102.51 126.57,102.51 127.77,102.51 128.97,102.51 130.2,102.54
  other v2: 89.42,68.841 90.32,68.841 88.97,69.621 90.77,69.621 89.42,70.4 90.32,70.4 89.4,96.02 90.3,96.02 168.04,96.461 168.939,96.461 88.95,96.8 90.75,96.8 167.589,97.24 169.39,97.24 89.4,97.579 90.3,97.579 168.04,98.02 168.939,98.02

## Polygon pours and split planes (outlines as drawn)
GND on Bottom Layer (solid): 72.751,111.61 120.55,111.61 120.65,100.6 118.66,100.62 97.67,100.62 96.9,99.85 72.751,99.85 72.731,99.87 71.4,105.74
MB on Bottom Layer (solid): 71.241,99.71 97,99.71 97.01,99.72 97.17,99.72 97.83,100.38 118.8,100.38 120.65,100.39 120.65,84.05 120.66,84.04 71.291,84.04 71.261,84.01 69.35,91.61
MA on Bottom Layer (solid): 72.521,83.49 120.66,83.49 120.66,64.74 120.66,64.17 120.2,64.16 116.19,64.16 114.87,65.48 114.86,65.5 113.87,66.49 72.501,66.49 72.471,66.52 66.58,74.79
GND on Bottom Layer (solid): 71.151,66.02 113.55,66.02 113.62,66.02 115.73,63.91 120.4,63.91 120.66,63.71 120.66,54.44 120.69,54.41 71.141,54.41 69.26,60.03
GND on Bottom Layer (solid): 78.261,118.47 188.02,118.47 188.02,50.98 188.02,38.1 78.261,38.1 51.84,79.68
VBAT+ on Bottom Layer (solid): 171.86,84.35 164.17,84.35 164.14,84.35 161.09,87.4 157.74,87.4 157.6,87.54 157.6,99.15 165.34,99.14 170.25,99.09 171.88,97.44
VBAT+ on Bottom Layer (solid): 131.96,59.95 134.65,59.93 136.95,62.28 136.87,70.8 132.58,70.83 131.97,71.58 131.97,106.54 131.91,106.48 120.54,106.48 120.62,106.4 120.65,59.89
VBAT+ on Mid-Layer 4 (solid): 120.93,103.92 120.81,103.8 120.81,63.05 121.75,62.11 152.41,62.11 161.92,71.62 161.92,79.61 165.68,83.37 168.97,83.37 171.06,83.38 171.88,84.21 171.88,97.3 170.26,98.92 165.55,98.92 159.81,104.66 121.69,104.66
MA on Mid-Layer 4 (solid): 72.52,83.49 120.66,83.49 120.66,64.74 120.66,64.62 120.2,64.16 116.19,64.16 114.87,65.48 114.86,65.5 113.87,66.49 72.5,66.49 72.47,66.52 64.44,74.79
MB on Mid-Layer 4 (solid): 71.241,99.71 97,99.71 97.01,99.72 97.17,99.72 97.83,100.38 118.8,100.38 120.65,100.39 120.65,84.05 120.66,84.04 71.291,84.04 71.261,84.01 67.42,91.8
GND on Mid-Layer 4 (solid): 78.26,118.47 188.02,118.47 188.02,50.98 188.02,38.1 78.26,38.1 40.91,78.46
VBAT+ on Mid-Layer 3 (solid): 120.94,103.93 120.82,103.81 120.82,63.06 121.76,62.12 152.42,62.12 161.93,71.63 161.93,79.62 165.69,83.38 168.98,83.38 171.07,83.39 171.89,84.22 171.89,97.31 170.27,98.93 165.56,98.93 159.82,104.67 121.7,104.67
GND on Mid-Layer 3 (solid): 78.26,118.47 188.02,118.47 188.02,50.98 188.02,38.1 78.26,38.1 45.24,78.79
MA on Mid-Layer 3 (solid): 72.52,83.49 120.66,83.49 120.66,64.74 120.66,64.62 120.2,64.16 116.19,64.16 114.87,65.48 114.86,65.5 113.87,66.49 72.5,66.49 72.47,66.52 66.19,74.74
MB on Mid-Layer 3 (solid): 71.241,99.71 97,99.71 97.01,99.72 97.17,99.72 97.83,100.38 118.8,100.38 120.65,100.39 120.65,84.05 120.66,84.04 71.291,84.04 71.261,84.01 68.03,91.8
MB on Mid-Layer 2 (solid): 71.24,99.71 97,99.71 97.01,99.72 97.17,99.72 97.83,100.38 118.8,100.38 120.65,100.39 120.65,84.05 120.66,84.04 71.29,84.04 71.26,84.01 70.31,91.73
MA on Mid-Layer 2 (solid): 72.52,83.49 120.66,83.49 120.66,64.74 120.66,64.62 120.2,64.16 116.19,64.16 114.87,65.48 114.86,65.5 113.87,66.49 72.5,66.49 72.47,66.52 69.31,75
VBAT+ on Mid-Layer 2 (solid): 120.93,103.92 120.81,103.8 120.81,63.05 121.75,62.11 152.41,62.11 161.92,71.62 161.92,79.61 165.68,83.37 168.97,83.37 171.06,83.38 171.88,84.21 171.88,97.3 170.26,98.92 165.55,98.92 159.81,104.66 121.69,104.66
GND on Mid-Layer 2 (solid): 78.26,118.47 188.02,118.47 188.02,50.98 188.02,38.1 78.26,38.1 52.79,78.69
VBAT+ on Mid-Layer 1 (solid): 120.93,103.92 120.81,103.8 120.81,63.05 121.75,62.11 152.41,62.11 161.92,71.62 161.92,79.61 165.68,83.37 168.97,83.37 171.06,83.38 171.88,84.21 171.88,97.3 170.26,98.92 165.55,98.92 159.81,104.66 121.69,104.66
MB on Mid-Layer 1 (solid): 71.24,99.71 97,99.71 97.01,99.72 97.17,99.72 97.83,100.38 118.8,100.38 120.65,100.39 120.65,84.05 120.66,84.04 71.29,84.04 71.26,84.01 66.23,91.77
MA on Mid-Layer 1 (solid): 72.52,83.49 120.66,83.49 120.66,64.74 120.66,64.62 120.2,64.16 116.19,64.16 114.87,65.48 114.86,65.5 113.87,66.49 72.5,66.49 72.47,66.52 62.64,74.59
GND on Mid-Layer 1 (solid): 78.26,118.47 188.02,118.47 188.02,50.98 188.02,38.1 78.26,38.1 38.1,78.46
GND on Top Layer (solid): 72.75,111.61 120.55,111.61 120.65,100.6 118.66,100.62 97.67,100.62 96.9,99.85 72.75,99.85 72.73,99.87
MB on Top Layer (solid): 71.24,99.71 97,99.71 97.01,99.72 97.17,99.72 97.83,100.38 118.8,100.38 120.65,100.39 120.65,84.05 120.66,84.04 71.29,84.04 71.26,84.01 68.66,91.73
MA on Top Layer (solid): 72.52,83.49 120.66,83.49 120.66,64.74 120.66,64.62 120.2,64.16 116.19,64.16 114.87,65.48 114.86,65.5 113.87,66.49 72.5,66.49 72.47,66.52 65.55,74.83
GND on Top Layer (solid): 71.15,66.02 113.55,66.02 113.62,66.02 115.73,63.91 120.61,63.91 120.66,63.86 120.66,54.44 120.69,54.41 71.14,54.41
VBAT+ on Top Layer (solid): 120.47,106.38 120.54,60.07 120.62,59.99 131.96,60 133.38,61.46 133.35,69.49 131.97,71.24 131.97,106.43
GND on Top Layer (solid): 78.26,118.47 188.02,118.47 188.02,50.98 188.02,38.1 78.26,38.1 48.73,79.2
VBAT+ on Top Layer (solid): 171.86,84.35 164.17,84.35 164.14,84.35 161.09,87.4 157.74,87.4 157.6,87.54 157.56,98.9 165.56,98.92 170.26,98.92 171.88,97.3

## Keep-outs
Keep-Out Layer:
  lines w0.254: 80.59,59.43 ccw(c84.59,59.43) 84.59,55.43 ; 80.59,106.93 cw(c84.59,106.93) 84.59,110.93 ; 174,110.93 cw(c174,106.93) 178,106.93 ; 174.01,55.43 ccw(c174.01,59.43) 178.01,59.43

## Silkscreen, mask and mechanical layers (free items; w line width, h text height)
Bottom Overlay:
  text "ey" at 152.18,84.948 h8 r26
  text "v1.1" at 152.815,75.931 h3 r90